# Altium PCB PCB2576 5V.PcbDoc
Units mil, origin at the board's own origin, x right, y up, seen from the top; angles counter-clockwise.
Board outline 3937.01 x 2755.91 mil, 2 copper layers (Top Layer, Bottom Layer); 12 components, 5 nets, 35 pads, 0 vias.
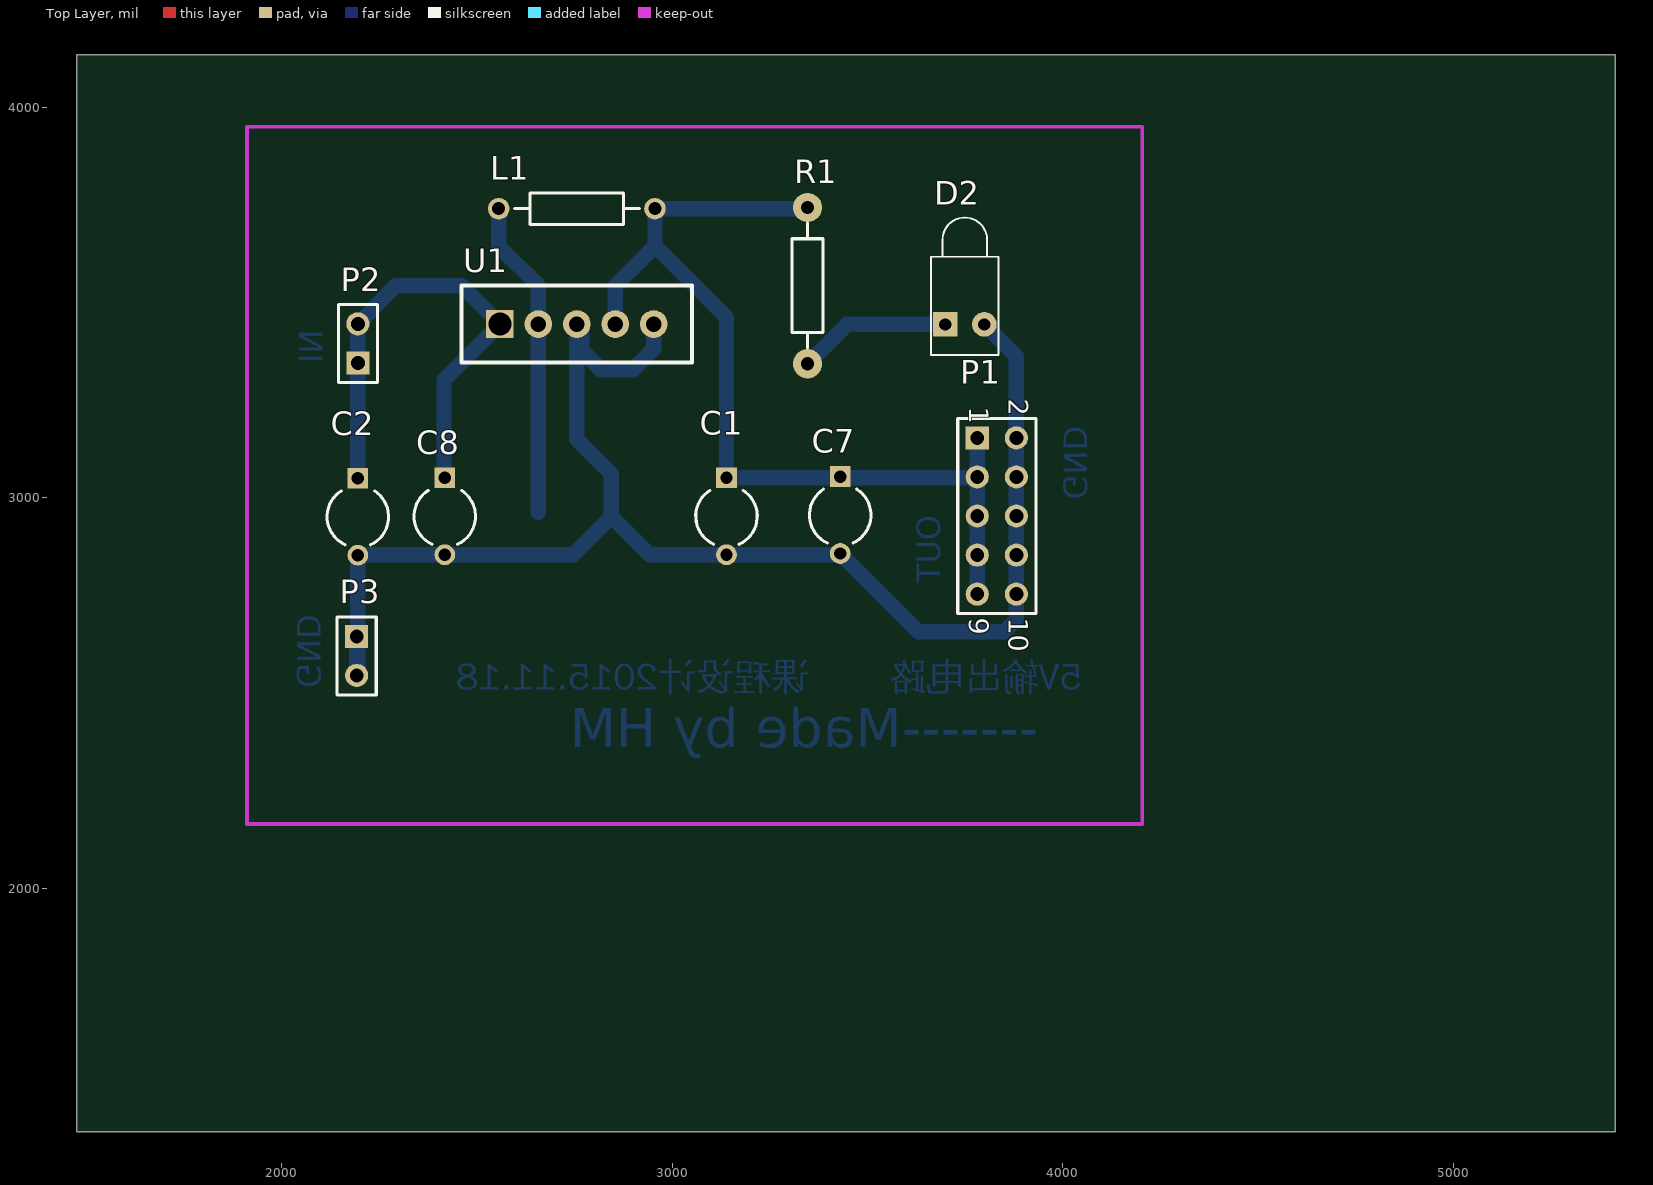
[diagram p0: Top Layer view]
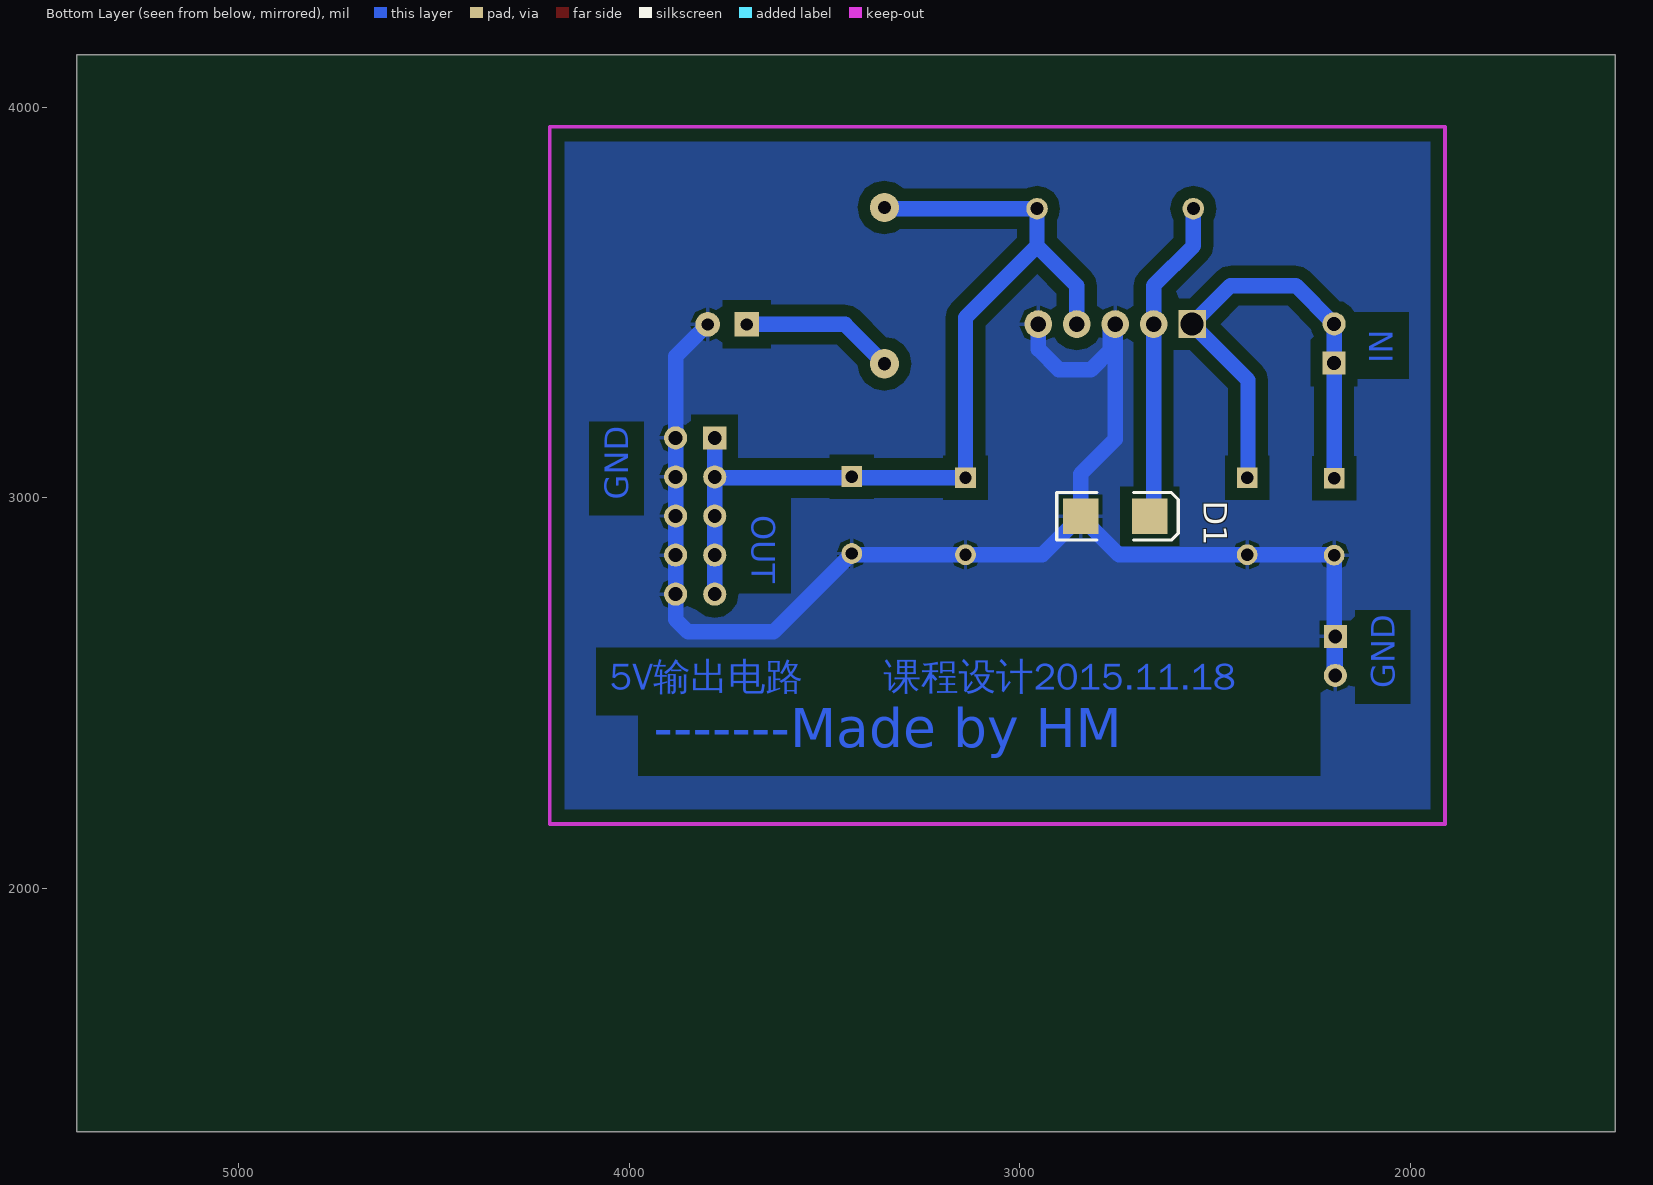
[diagram p1: Bottom Layer view, seen from below]

## Layer stack, top to bottom
Top Solder: solder mask 0.4, Solder Resist, Dk 3.5
Top Layer: signal copper 1.4
Dielectric1: dielectric 12.6, FR-4, Dk 4.8
Bottom Layer: signal copper 1.4
Bottom Solder: solder mask 0.4, Solder Resist, Dk 3.5

## Board outline
1476.38,1377.95 1476.38,4133.86 5413.39,4133.86 5413.39,1377.95

## Design rules (kind name [scope] priority, off if disabled: settings)
Clearance [All] p1: gap=30
PolygonConnect [All] p1: connectstyle=Relief reliefconductorwidth=10 reliefentries=4 polygonreliefangle="90 Angle" airgapwidth=10
RoutingVias [All] p1: holewidth=28 width=50 viastyle="Through Hole" minholewidth=28 minwidth=50 maxholewidth=28 maxwidth=50
SolderMaskExpansion [All] p1: expansion=4
Width [All] p1: maxlimit=78.74 minlimit=31.5 preferedwidth=39.37
29 further rules are at their usual default settings.

## Components (designator, comment, footprint, x,y, rotation, side; value= is the part's Value field where it differs from the comment)
C1 "Cap Pol1" CAPR5-4X5 3139,2953 r270 top
C2 "Cap Pol1" CAPR5-4X5 2195.5,2951.76 r270 top
C7 "Cap Pol1" CAPR5-4X5 3430,2956 r270 top
C8 "Cap Pol1" CAPR5-4X5 2418,2953 r270 top
D1 "Diode 1N4007" SMB 2755.91,2952.76 r180 bottom
D2 "LED1" LED-1 3749,3444 r90 top
L1 "Res2" AXIAL-0.4#1 2755.91,3740.16 r0 top
P1 "Header 5X2" HDR2X5 3780.86,3153.61 r270 top
P2 "Header 2" HDR1X2 2195.5,3345.46 r90 top
P3 "Header 2" HDR1X2 2192.5,2645.63 r270 top
R1 "Res2" AXIAL-0.4#2 3346.46,3543.31 r90 top
U1 "LM2576" LM2576 2460.63,3444.88 r0 top

## Footprints (in the part's own frame and the unit in brackets; to place one, negate y for a bottom-side part, rotate by r counter-clockwise, add the part's x,y. Pads: shape width x height; smd on the part's side, far side on the other; paste and mask are expansions set on the pad)
AXIAL-0.4#1 [mm] "Axial Device, Thru-Hole; 2 Leads; 0.4 in Pin Spacing"
  round 1.4 hole 0.85: 1(-5.08,0) 2(5.08,0)
  silkscreen extent -4.06,-1.02 4.06,1.02
AXIAL-0.4#2 [mm] "Axial Device, Thru-Hole; 2 Leads; 0.4 in Pin Spacing"
  round 1.905 hole 0.85: 1(-5.08,0) 2(5.08,0)
  silkscreen extent -4.06,-1.02 4.06,1.02
CAPR5-4X5 [mm] "Capacitor; 2 Leads"
  rect 1.35x1.35 hole 0.8: 1(-2.5,0)
  round 1.35 hole 0.8: 2(2.5,0)
  silkscreen extent -1.69,-2 1.82,2
HDR1X2 [mm] "Connector; Header; 2 Position"
  rect 1.5x1.5 hole 0.9: 1(0,0)
  round 1.5 hole 0.9: 2(2.54,0)
  silkscreen extent -1.27,-1.27 3.81,1.27
HDR2X5 [mm] "Connector; Header; 5x2 Position"
  rect 1.5x1.5 hole 0.9: 1(0,0)
  round 1.5 hole 0.9: 2(0,2.54) 3(2.54,0) 4(2.54,2.54) 5(5.08,0) 6(5.08,2.54) 7(7.62,0) 8(7.62,2.54) 9(10.16,0) 10(10.16,2.54)
  silkscreen extent -1.27,-1.27 11.43,3.81
LED-1 [mm] "LED; 2 Leads"
  rect 1.6x1.6 hole 0.8: 1(0,1.27)
  round 1.6 hole 0.8: 2(0,-1.27)
  silkscreen extent -2,-2.2 6.95,2.2
LM2576 [mm]
  rect 1.8x1.8 hole 1.5: 1(2.5,0)
  round 1.8 hole 1.016: 2(5,0) 3(7.5,0) 4(10,0) 5(12.5,0)
  silkscreen extent 0,-2.5 15,2.5
SMB [mm] "DO-214-AA/SMB; 2 C-Bend Leads; Body 5.3 x 3.6 mm, inc. leads (LxW)"
  rect 2.3x2.3 smd: 1(-2.25,0) 2(2.25,0)
  silkscreen extent -3.8,-1.55 4.1,1.55

## Part data
C1 C2 C7 C8: "Polarized Capacitor (Radial)"
D1: "1 Amp General Purpose Rectifier"
D2: "Typical RED GaAs LED"
L1 R1: "Resistor"
P1: "Header, 5-Pin, Dual row"
P2 P3: "Header, 2-Pin"

## Nets (pads, with @x,y where several pads share a name; then routed paths per layer and width w, separated by ;. In a path a pad name is that pad's centre, name@x,y a point inside that pad or via, vN(x,y) a via of type N, cw(c..) or ccw(c..) an arc to the next point about the centre after c; other vN are vias at no path point)
GND: C1.2 C2.2 C7.2 C8.2 D1.1 D2.2 P1.2 P1.4 P1.6 P1.8 P1.10 P3.1 P3.2 U1.3 U1.5 | length 3952.6
  Bottom Layer w39.37: P3.2 P3.1 ; P3.2@2195.5,2545.63 C2.2 ; C2.2@2201,2854.33 2362.2,2854.33 2746.06,2854.33 D1.1 ; U1.5 2952.76,3380.76 2900,3328 2818,3328 2769.21,3376.79 2769.21,3431.57 U1.3 2755.91,3149.61 2844.49,3061.02 D1.1 ; C7.2@3430,2854.33 2942.91,2854.33 D1.1 ; C7.2 3630.57,2657 3849,2657 3880.86,2688.86 P1.10 P1.8 P1.6 P1.4 P1.2 ; D2.2 3880.86,3362.14 P1.2 ; P1.2@3880.86,3147.61 P1.2
NetC1_1: C1.1 C7.1 L1.2 P1.1 P1.3 P1.5 P1.7 P1.9 R1.2 U1.4 | length 2431.1
  Bottom Layer w39.37: U1.4 2854.33,3543.31 2955.91,3644.88 ; C1.1@3139,3061.43 3139,3461.79 2955.91,3644.88 ; C1.1@3139.24,3051.18 3778.43,3051.18 P1.3 ; R1.2 3343.31,3740.16 L1.2 2955.91,3644.88 ; P1.9 P1.7 P1.5 P1.3 ; P1.1 P1.3
NetC2_1: C2.1 C8.1 P2.1 P2.2 U1.1 | length 1293.1
  Bottom Layer w39.37: C2.1 P2.2 2293.36,3543.31 2460.63,3543.31 U1.1 2416,3301.83 C8.1@2416,3051.18
NetD1_2: D1.2 L1.1 U1.2 | length 819.6
  Bottom Layer w39.37: L1.1 2555.91,3644.88 2657.48,3543.31 U1.2 D1.2@2657.48,2962.6
NetD2_1: D2.1 R1.1 | length 394.3
  Bottom Layer w39.37: R1.1 3447.15,3444 D2.1

## Polygon pours and split planes (outlines as drawn)
GND on Bottom Layer "Top Layer-GND" (solid, pour order 5): 1929,3942.65 4209,3942.65 4209,2171 1929,2171

## Keep-outs
Keep-Out Layer:
  lines w10: 1912,2165.35 1912,3950 4203,3950 4203,2165.35 1912,2165.35

## Other copper
Bottom Layer:
  text "IN" at 2045,3345 h60 r270
  text "GND" at 4002,2995 h60 r270
  text "OUT" at 3686,2956 h60 r90
  text "GND" at 2041,2513 h60 r270
  text "课程设计2015.11.18" at 3348,2486 h120
  text "5V输出电路" at 4049,2486 h120
  text "-------Made by HM" at 3937.01,2362.2 h100

## Text inside footprints (layer, text, board x,y; h text height)
P1: Top Overlay "10" at 3860.86,2693.61 h50 r270; Top Overlay "9" at 3760.86,2693.61 h50 r270; Top Overlay "1" at 3760.86,3233.61 h50 r270; Top Overlay "2" at 3860.86,3253.61 h50 r270